# EAGLE board manual stm (EAGLE 9.2.1)
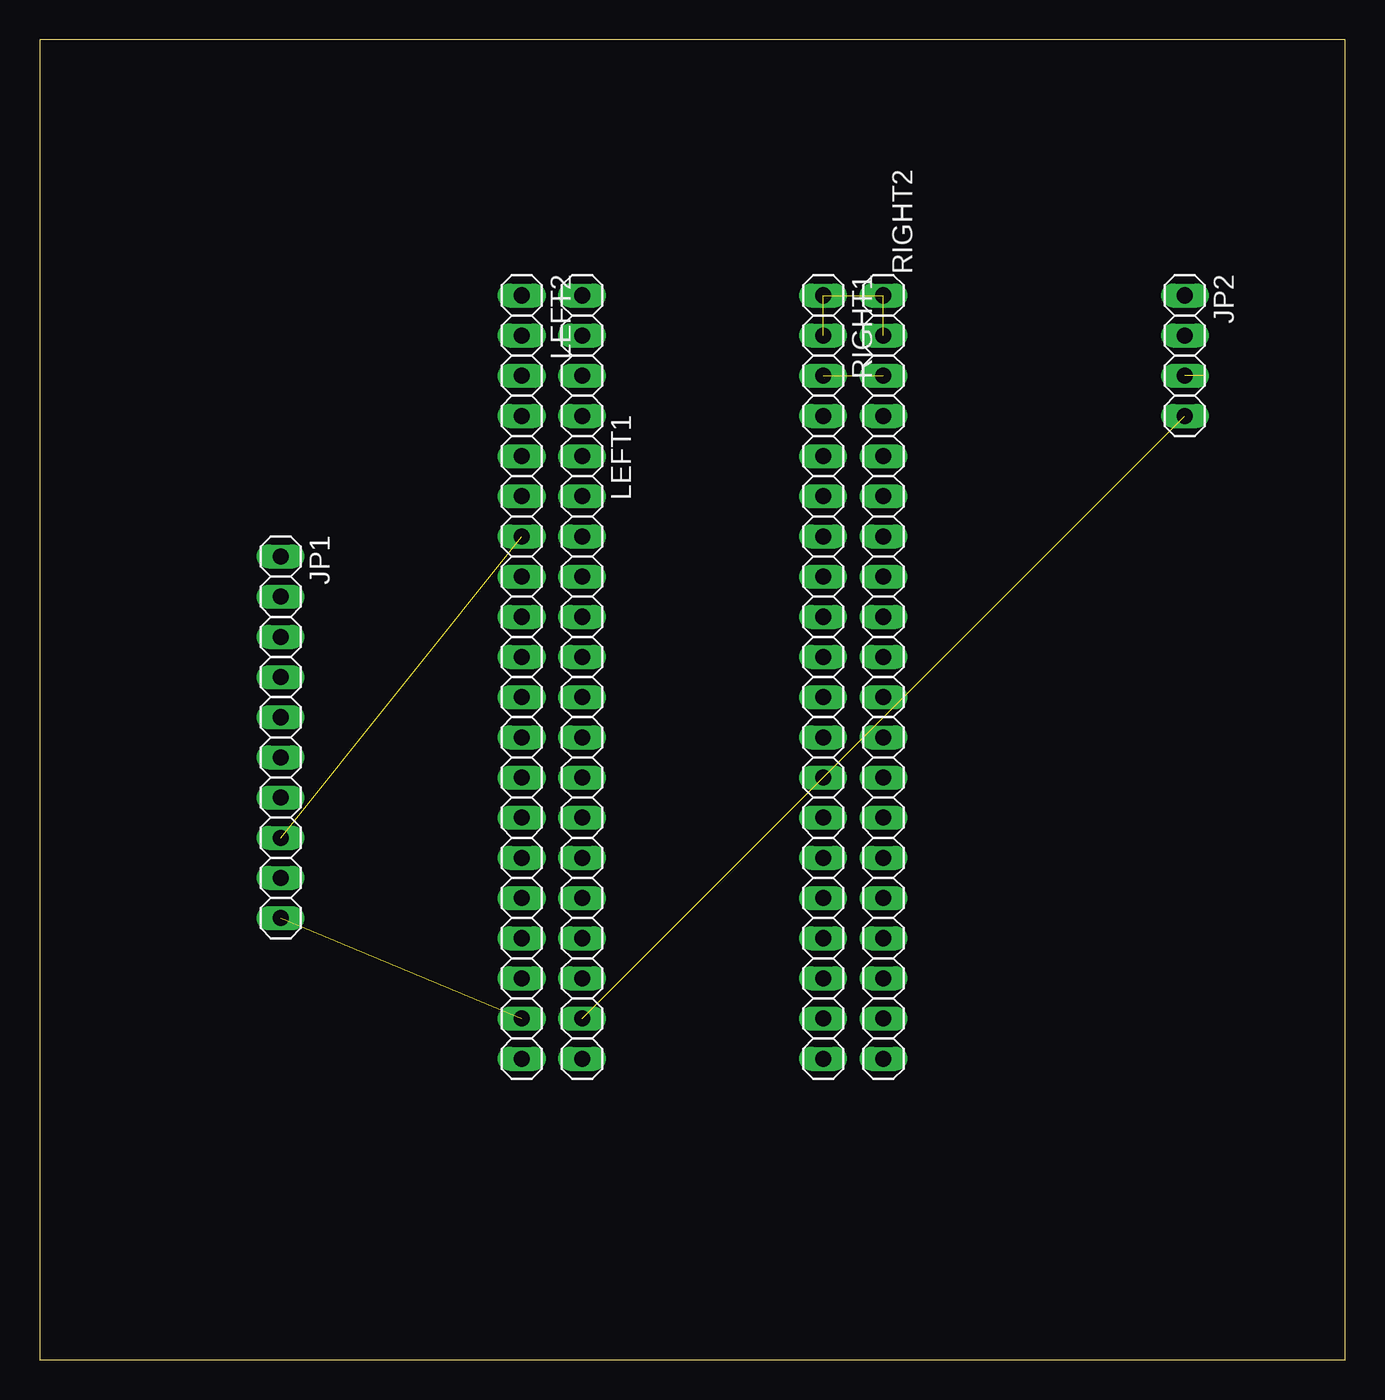
[diagram p0: board, top side]
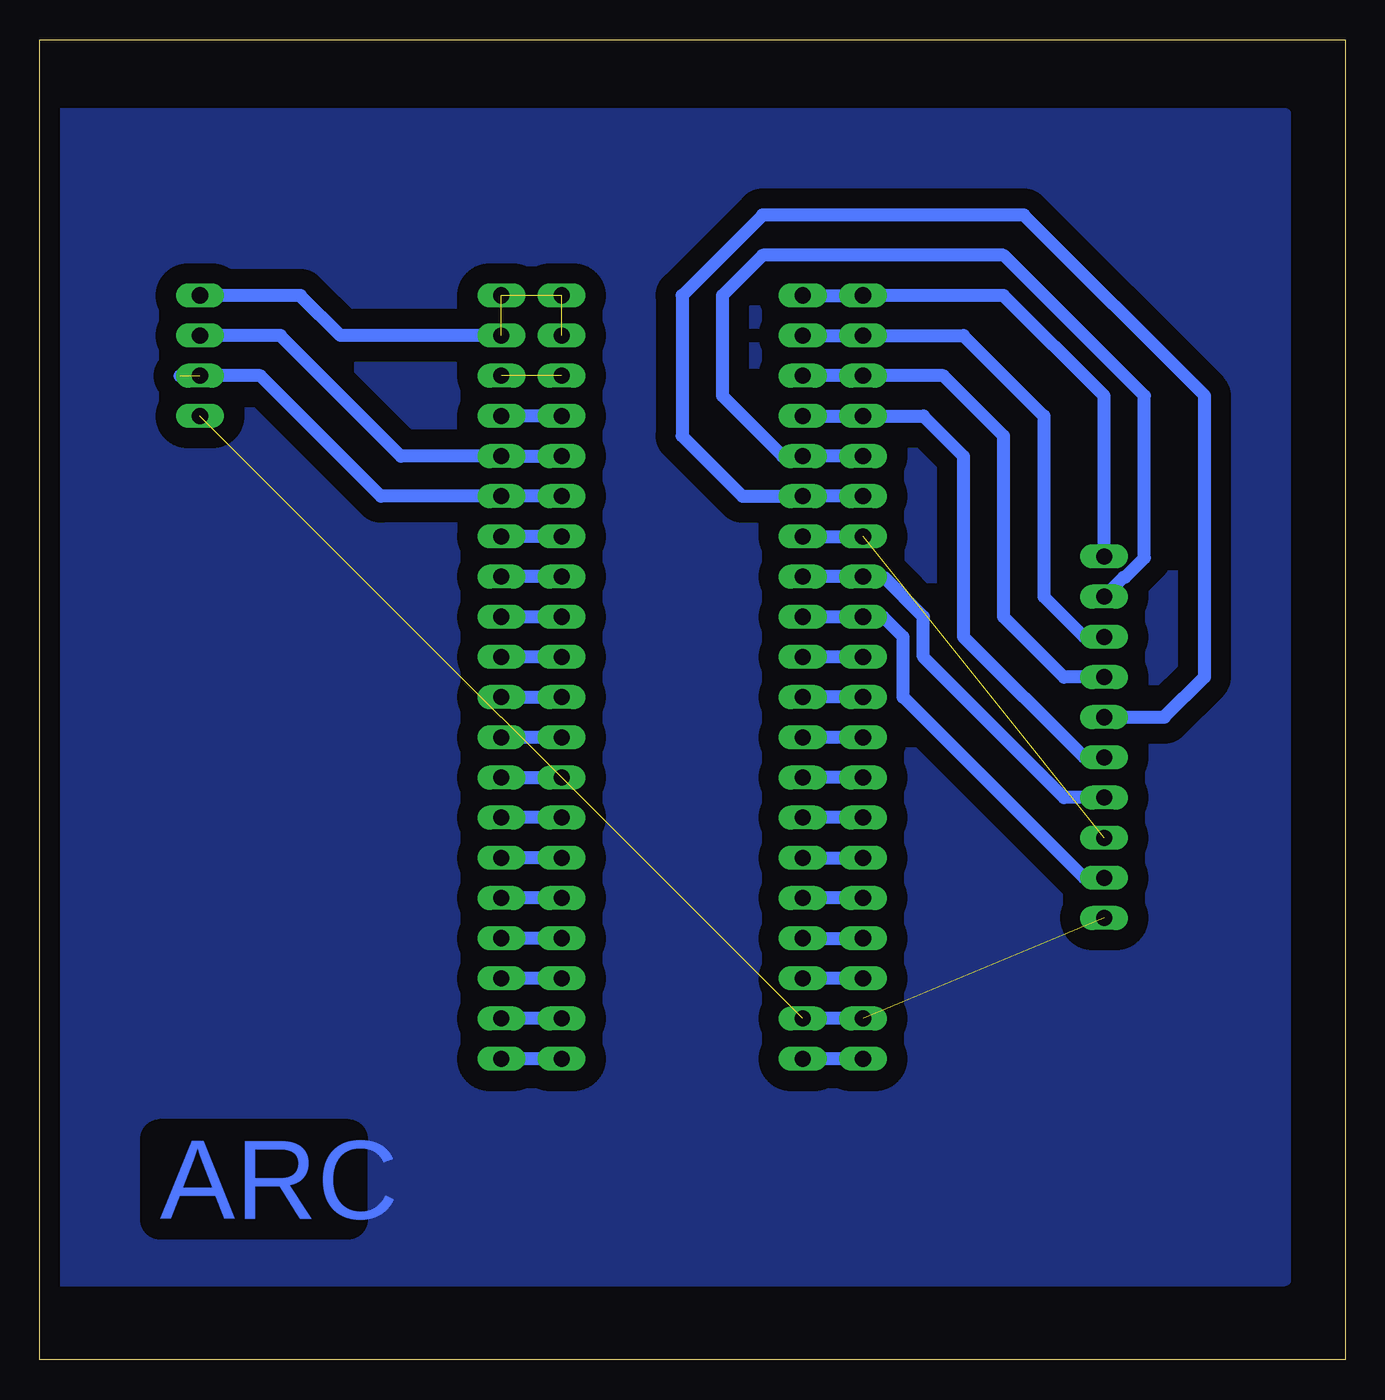
[diagram p1: board, bottom side, seen from below]

Size 82.53 x 83.49 mm. Coordinates in mm from the lower left corner, seen from the top.
Outline: 0,0 82.53,0 82.53,83.49 0,83.49 0,0
Copper layers (1*16): Top 0.035mm / dielectric 1.5mm / Bottom 0.035mm
Design rules "default": minimum track width 6mil, minimum drill 0.35mm, track to track 6mil, track to pad 6mil, pad to pad 6mil, via to via 6mil, smd to smd 6mil, copper to edge 40mil, drill to drill 6mil, minimum pad ring 10mil, minimum via ring 8mil, stop-mask expansion 4mil, vias tented up to drill 0mil, thermal gap 10mil

## Footprints (pad centres in the part's own frame; a part is rotated, then mirrored left to right if it is on the bottom)
1X10 = drill 1.016 long: 1 -11.43,0; 2 -8.89,0; 3 -6.35,0; 4 -3.81,0; 5 -1.27,0; 6 1.27,0; 7 3.81,0; 8 6.35,0; 9 8.89,0; 10 11.43,0
1X04 = drill 1.016 long: 1 -3.81,0; 2 -1.27,0; 3 1.27,0; 4 3.81,0
1X20 = drill 1.016 long: 1 -24.13,0; 2 -21.59,0; 3 -19.05,0; 4 -16.51,0; 5 -13.97,0; 6 -11.43,0; 7 -8.89,0; 8 -6.35,0; 9 -3.81,0; 10 -1.27,0; 11 1.27,0; 12 3.81,0; 13 6.35,0; 14 8.89,0; 15 11.43,0; 16 13.97,0; 17 16.51,0; 18 19.05,0; 19 21.59,0; 20 24.13,0

## Placement (x,y rotation side)
JP1  [1X10]  15.24,39.37 270 top
JP2  [1X04]  72.39,63.5 270 top
LEFT1  [1X20]  34.29,43.18 270 top
LEFT2  [1X20]  30.48,43.18 270 top
RIGHT1  [1X20]  49.53,43.18 270 top
RIGHT2  [1X20]  53.34,43.18 270 top

## Library data of the parts
JP1 JP2 LEFT1 LEFT2 RIGHT1 RIGHT2 = pinhead

## Nets
ENCODER4: RIGHT1.4 RIGHT2.4
GND1: JP1.10 JP2.4 LEFT1.19 LEFT2.19
N$1: LEFT1.18 LEFT2.18
N$2: JP2.1 RIGHT1.1 RIGHT1.2 RIGHT2.1 RIGHT2.2
N$4: JP1.1 LEFT1.1 LEFT2.1
N$5: JP1.3 LEFT1.2 LEFT2.2
N$6: JP1.4 LEFT1.3 LEFT2.3
N$7: JP1.6 LEFT1.4 LEFT2.4
N$8: JP1.2 LEFT1.5 LEFT2.5
N$9: RIGHT1.10 RIGHT2.10
N$10: RIGHT1.9 RIGHT2.9
N$11: JP1.7 LEFT1.8 LEFT2.8
N$12: JP1.9 LEFT1.9 LEFT2.9
N$13: LEFT1.10 LEFT2.10
N$14: LEFT1.11 LEFT2.11
N$15: RIGHT1.19 RIGHT2.19
N$16: RIGHT1.18 RIGHT2.18
N$17: RIGHT1.17 RIGHT2.17
N$18: RIGHT1.14 RIGHT2.14
N$19: RIGHT1.15 RIGHT2.15
N$20: RIGHT1.16 RIGHT2.16
N$21: LEFT1.12 LEFT2.12
N$22: RIGHT1.13 RIGHT2.13
N$23: LEFT1.17 LEFT2.17
N$24: LEFT1.16 LEFT2.16
N$25: LEFT1.15 LEFT2.15
N$26: RIGHT1.7 RIGHT2.7
N$27: LEFT1.20 LEFT2.20
N$28: JP1.5 LEFT1.6 LEFT2.6
N$30: LEFT1.14 LEFT2.14
N$31: JP1.8 LEFT1.7 LEFT2.7
N$32: RIGHT1.11 RIGHT2.11
N$33: RIGHT1.12 RIGHT2.12
N$34: LEFT1.13 LEFT2.13
N$35: RIGHT1.3 RIGHT2.3
N$36: RIGHT1.8 RIGHT2.8
N$37: JP2.2 RIGHT1.5 RIGHT2.5
N$38: JP2.3 RIGHT1.6 RIGHT2.6
N$39: RIGHT1.20 RIGHT2.20

## Tracks (layer width: path | path; a pad name or v marks a point on that pad's centre or on a via)
ENCODER4
  Bottom 0.813: RIGHT1.4 RIGHT2.4
GND
  pour Bottom (isolate 1.27): 5.08,78.74 81.28,78.74 81.28,5.08 3.81,5.08 3.81,78.74
GND1  (2 unrouted)
  Bottom 0.813: LEFT2.19 LEFT1.19
N$1
  Bottom 0.813: LEFT2.18 LEFT1.18
N$2  (3 unrouted)
  Bottom 0.813: RIGHT2.2 63.5,64.77 66.04,67.31 JP2.1
N$4
  Bottom 0.813: LEFT1.1 LEFT2.1 21.59,67.31 15.24,60.96 JP1.1
N$5
  Bottom 0.813: LEFT1.2 LEFT2.2 24.13,64.77 19.05,59.69 19.05,48.26 16.51,45.72 JP1.3
N$6
  Bottom 0.813: LEFT1.3 LEFT2.3 25.4,62.23 21.59,58.42 21.59,46.99 17.78,43.18 JP1.4
N$7
  Bottom 0.813: LEFT1.4 LEFT2.4 26.67,59.69 24.13,57.15 24.13,45.72 16.51,38.1 JP1.6
N$8
  Bottom 0.813: LEFT2.5 LEFT1.5 | JP1.2 14.02,49.48 13.93,49.48 12.7,50.71 12.7,60.96 21.59,69.85 36.83,69.85 39.37,67.31 39.37,60.96 35.56,57.15 LEFT1.5 | 34.38,57.15 LEFT1.5
N$9
  Bottom 0.813: RIGHT1.10 RIGHT2.10
N$10
  Bottom 0.813: RIGHT1.9 RIGHT2.9
N$11
  Bottom 0.813: LEFT1.8 LEFT2.8 29.21,49.53 26.67,46.99 26.67,44.45 17.78,35.56 JP1.7
N$12
  Bottom 0.813: LEFT1.9 LEFT2.9 29.21,46.99 27.94,45.72 27.94,41.91 16.51,30.48 JP1.9
N$13
  Bottom 0.813: LEFT2.10 LEFT1.10
N$14
  Bottom 0.813: LEFT2.11 LEFT1.11
N$15
  Bottom 0.813: RIGHT1.19 RIGHT2.19
N$16
  Bottom 0.813: RIGHT1.18 RIGHT2.18
N$17
  Bottom 0.813: RIGHT1.17 RIGHT2.17
N$18
  Bottom 0.813: RIGHT1.14 RIGHT2.14
N$19
  Bottom 0.813: RIGHT1.15 RIGHT2.15
N$20
  Bottom 0.813: RIGHT1.16 RIGHT2.16
N$21
  Bottom 0.813: LEFT2.12 LEFT1.12
N$22
  Bottom 0.813: RIGHT2.13 RIGHT1.13
N$23
  Bottom 0.813: LEFT1.17 LEFT2.17
N$24
  Bottom 0.813: LEFT2.16 LEFT1.16
N$25
  Bottom 0.813: LEFT1.15 LEFT2.15
N$26
  Bottom 0.813: RIGHT1.7 RIGHT2.7
N$27
  Bottom 0.813: LEFT2.20 LEFT1.20
N$28
  Bottom 0.813: LEFT2.6 LEFT1.6 38.1,54.61 41.91,58.42 41.91,67.31 36.83,72.39 20.32,72.39 8.89,60.96 8.89,46.99 8.89,43.18 11.43,40.64 JP1.5
N$30
  Bottom 0.813: LEFT2.14 LEFT1.14
N$31  (1 unrouted)
  Bottom 0.813: LEFT1.7 LEFT2.7
N$32
  Bottom 0.813: RIGHT2.11 RIGHT1.11
N$33
  Bottom 0.813: RIGHT1.12 RIGHT2.12
N$34
  Bottom 0.813: LEFT2.13 LEFT1.13
N$35  (1 unrouted)
N$36
  Bottom 0.813: RIGHT1.8 RIGHT2.8
N$37
  Bottom 0.813: RIGHT1.5 RIGHT2.5 59.69,57.15 67.31,64.77 JP2.2
N$38  (1 unrouted)
  Bottom 0.813: RIGHT1.6 RIGHT2.6 60.96,54.61 68.58,62.23 73.66,62.23
N$39
  Bottom 0.813: RIGHT1.20 RIGHT2.20

## Text on the board
Bottom: ARC